# Altium PCB PCB.PcbDoc (part 2 of 3)
Units mil, origin at the board's own origin, x right, y up, seen from the top; angles counter-clockwise.
Board outline 8690 x 2710 mil, 2 copper layers (Top Layer, Bottom Layer); 78 components, 139 nets, 435 pads, 186 vias.
Unrouted connection lines stored in the file: 1.
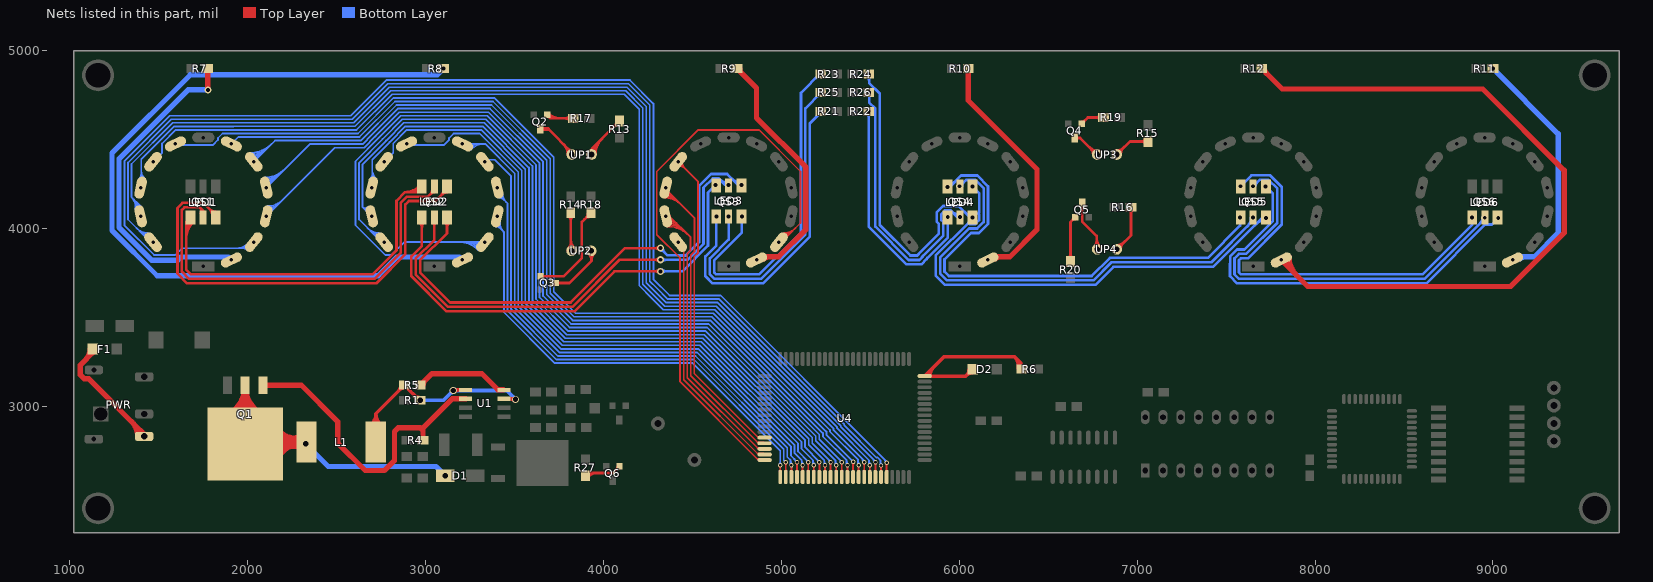
[diagram p2: the nets of this part, all layers, seen from the top]

## Via types
v1: diameter 24, hole 15, Top Layer to Bottom Layer, 111 vias
v2: diameter 40, hole 22, Top Layer to Bottom Layer, 33 vias
v3: diameter 40, hole 30, Top Layer to Bottom Layer, 28 vias
v4: diameter 30, hole 20, Top Layer to Bottom Layer, 10 vias
v5: diameter 35, hole 20, Top Layer to Bottom Layer, 3 vias
v6: diameter 40, hole 20, Top Layer to Bottom Layer, 1 vias

## Nets (pads, with @x,y where several pads share a name; then routed paths per layer and width w, separated by ;. In a path a pad name is that pad's centre, name@x,y a point inside that pad or via, vN(x,y) a via of type N, cw(c..) or ccw(c..) an arc to the next point about the centre after c; other vN are vias at no path point) (continued)
NetD1_3: D1.3 L1.1 Q1.2 | length 4554.5
  Top Layer w30: Q1.2@1889.61,2954.32 ccw(c1793.44,3119.99) Q1.2@1985,3120 ; Q1.2@1904.67,2928.38 ccw(c1823.69,3067.88) 1985,3067.88 ccw(c2146.31,3067.88) Q1.2@2065.33,2928.38 ; Q1.2@1915,2790 Q1.2@1935,2810 ; Q1.2@1919.73,2902.43 ccw(c1853.94,3015.78) 1985,3015.78 ccw(c2116.06,3015.78) Q1.2@2050.27,2902.43 ; Q1.2@2080.39,2954.32 cw(c2176.56,3119.99) Q1.2@1985,3120 ; Q1.2@2100.46,2862.42 ccw(c2217.49,2940.92) 2217.49,2800 ; Q1.2@2106.53,2727.58 cw(c2228.74,2660.68) 2228.74,2800 ; Q1.2@2125.38,2879.13 ccw(c2273.74,2978.65) L1.1@2273.74,2800 ; Q1.2@2132.85,2713.17 cw(c2279.37,2632.97) L1.1@2279.37,2800 ; Q1.2@2150.29,2895.84 ccw(c2329.99,3016.38) L1.1@2330,2800 ; Q1.2@2159.16,2698.77 cw(c2329.99,2605.25) L1.1@2330,2800 ; 2210.4,2816.65 ccw(c2239.27,2926.51) L1.1@2305.47,2834.2 ; 2217.78,2783.5 cw(c2243.79,2686.41) L1.1@2304.56,2766.48 ; 2232.62,2773.91 ccw(c2206.82,2870.21) L1.1@2293.44,2820.84 ; 2232.63,2773.91 cw(c2258.43,2677.63) L1.1@2308.75,2763.67 ; 2259.02,2794.55 ccw(c2244.31,2849.47) L1.1@2293.55,2821.04 ; 2261.49,2803.22 cw(c2248.07,2752.18) L1.1@2293.65,2778.78 ; 2272.1,2800.43 ccw(c2287.54,2859.2) L1.1@2322.96,2809.82 ; L1.1@2288.79,2800 cw(c2288.79,2753.79) L1.1@2321.46,2786.46 ; L1.1@2290.64,2810.54 cw(c2277.84,2762.77) L1.1@2320.67,2787.5 ; L1.1@2291.66,2789.73 cw(c2302.18,2750.47) L1.1@2322.5,2785.67 ; L1.1@2293.55,2778.96 ccw(c2205.57,2728.16) 2231.86,2826.29 ccw(c2258.15,2924.45) L1.1@2308.96,2836.45 ; L1.1@2300.24,2770.24 ccw(c2228.39,2698.39) 2228.39,2800 ccw(c2228.39,2901.61) L1.1@2300.24,2829.76 ; Q1.2@1985,3120 Q1.2@1985,2790 1995,2800 L1.1@2330,2800
  Bottom Layer w30: v3(2325,2790) 2452,2663 3057,2663 v3(3110,2610)
NetD2_2: D2.2 R6.1 U4.40 | length 1268.6
  Top Layer w20: U4.40@5815.16,3171.22 cw(c5840.15,3171.22) 5822.48,3188.9 ; U4.40@5835.16,3171.22 cw(c5908.44,3171.22) 5856.62,3223.04 ; D2.2@6055,3210 cw(c6006.72,3210) 6040.86,3175.86 cw(c6075,3141.72) D2.2@6075,3190 ; D2.2@6075,3210 6036.22,3171.22 U4.40@5804.8,3171.22 5913.58,3280 6310,3280 ; R6.1@6330.29,3212.95 ccw(c6257.53,3227.52) 6310,3280 ; R6.1@6334.66,3220.86 ccw(c6311.67,3245) 6345,3245 ; 6336.42,3253.58 cw(c6301.54,3218.71) R6.1@6349.9,3209.02 ; R6.1@6355,3215 6345,3205 6345,3245 ; R6.1@6355.34,3220.86 cw(c6378.33,3245) 6345,3245 ; 6310,3280 6345,3245
NetF1_1: F1.1 PWR.1 | length 875.7
  Top Layer w30: 1088.02,3262.69 ccw(c1027.71,3323) F1.1@1113,3323 ; F1.1@1128,3323 1128,3302.67 1058.08,3232.75 1058.08,3177.97 1079.78,3156.27 1104.73,3156.27 1417.09,2843.91 PWR.1@1417.09,2832.02 ; 1346.92,2914.08 cw(c1264.86,2832.02) PWR.1@1380.91,2832.02 ; 1398.14,2862.86 cw(c1367.29,2832.02) PWR.1@1410.91,2832.02
NetL1_2: L1.2 R1.1 R5.1 U1.1 U1.7 | length 1895
  Top Layer w20: L1.2@2689.57,2895.19 ccw(c2635.62,2959.76) 2719.76,2959.76 ; L1.2@2702.4,2879.84 ccw(c2671.36,2916.99) 2719.76,2916.99 ccw(c2768.17,2916.99) L1.2@2737.13,2879.84 ; L1.2@2719.76,2800 2719.76,2959.76 ; L1.2@2749.96,2895.19 cw(c2803.91,2959.76) 2719.76,2959.76 ; 2845.86,3085.86 ccw(c2811.72,3120) R5.1@2860,3120 ; R5.1@2857.93,3097.93 cw(c2875,3080.86) R5.1@2875,3105 ; R5.1@2885,3105 cw(c2885,3080.86) R5.1@2902.07,3097.93 ; R5.1@2900,3120 ccw(c2948.28,3120) 2914.14,3085.86 ; R1.1@2944.39,3055.61 ccw(c2970,3081.21) R1.1@2970,3045 ; R1.1@2946.62,3047.62 ccw(c2978.02,3056.03) R1.1@2966.44,3025.66 ; R1.1@2950,3035 ccw(c2913.79,3035) 2939.39,3060.61 ccw(c2965,3086.21) R1.1@2965,3050 ; v3(2970,3035) 2965,3035 R5.1@2880,3120 2719.76,2959.76 ; v3(3155,3090) 3158,3093 U1.1@3224.5,3093 ; v3@3162.07,3082.93 cw(c3186.38,3058.62) 3186.38,3093 ; U1.7@3439.5,3043 3502,3043 v3(3505,3040) ; U1.7@3473.62,3043 cw(c3473.62,3008.62) v3@3497.93,3032.93
  Bottom Layer w20: v3(2970,3035) 3100,3035 v3(3155,3090) 3455,3090 v3(3505,3040) ; v3@2977.07,3027.93 cw(c2994.14,3010.86) 2994.14,3035 cw(c2994.14,3059.14) v3@2977.07,3042.07 ; v3@3145,3090 cw(c3120.86,3090) 3137.93,3072.93 cw(c3155,3055.86) v3@3155,3080 ; v3@3162.07,3082.93 cw(c3179.14,3065.86) 3179.14,3090 cw(c3179.14,3114.14) v3@3162.07,3097.07 ; v3@3495,3040 ccw(c3470.86,3040) 3487.93,3057.07 ccw(c3505,3074.14) v3@3505,3050
NetLED1_3: LED1.3 LED2.0 | length 2417.9
  Top Layer w15: 1654,3944.59 cw(c1784.37,3944.59) LED1.3@1692.18,4036.78 ; 1654,3980.81 cw(c1748.15,3980.81) LED1.3@1681.58,4047.38 ; 1654,4017.02 cw(c1711.94,4017.02) LED1.3@1670.97,4057.99 ; LED1.3@1678,4062.77 1654,4038.77 1654,3768.5 1679.76,3742.74 2701.06,3742.74 2835.26,3876.94 2835.26,4155.97 2884.42,4205.13 ; 2919.41,4205.13 ccw(c2919.41,4280.96) LED2.0@2974.34,4228.68 ; LED2.0@2952.11,4211.11 ccw(c2938.03,4225.19) LED2.0@2957.94,4225.19 ; LED2.0@2963.47,4239.02 cw(c2884.42,4314.26) 2884.42,4205.13 ; LED2.0@2967.83,4207.9 ccw(c2958.77,4192.49) 2946.13,4205.13 ; LED2.0@2978,4237 2946.13,4205.13 ; 2884.42,4205.13 2946.13,4205.13
NetLED1_4: LED1.4 LED2.1 | length 2726.4
  Top Layer w15: 1785.31,4109.27 cw(c1750.62,4074.58) LED1.4@1799.67,4074.58 ; 1785.93,4108.64 ccw(c1819.73,4142.44) LED1.4@1819.73,4094.64 ; LED1.4@1819.73,4062.77 1819.73,4074.84 1749.93,4144.64 1632.84,4144.64 1604,4115.8 1604,3747.78 1659.05,3692.74 2721.77,3692.74 2885.26,3856.23 2885.26,4135.26 2905.13,4155.13 3055.13,4155.13 3119.73,4219.73 LED2.1@3119.73,4237 ; 3081.63,4181.63 ccw(c3038.07,4225.19) LED2.1@3099.67,4225.19 ; 3094.8,4194.8 cw(c3119.73,4169.88) LED2.1@3119.73,4205.13
NetLED1_5: LED1.5 LED2.2 | length 2450.9
  Top Layer w15: LED1.5@1736.69,4086.99 ccw(c1708.61,4098.25) 1730,4119.64 ; 1746.07,4103.57 cw(c1731.55,4089.05) LED1.5@1750.61,4081.41 ; LED1.5@1748,4062.77 1748,4101.64 1730,4119.64 ; 3025.79,4193.11 ccw(c3001.59,4217.31) LED2.2@3035.82,4217.31 ; LED2.2@3030.6,4197.92 cw(c3048,4180.52) LED2.2@3048,4205.13 ; LED2.2@3048,4237 3048,4215.32 3012.81,4180.13 2894.77,4180.13 2860.26,4145.62 2860.26,3866.58 2711.42,3717.74 1669.4,3717.74 1629,3758.14 1629,4105.45 1643.19,4119.64 1730,4119.64
NetLED2_3: LED2.3 LED3.0 | length 2835.7
  Top Layer w15: LED2.3@2963.82,4037.78 cw(c2929.57,4003.53) 2978,4003.53 cw(c3026.43,4003.53) LED2.3@2992.18,4037.78 ; LED2.3@2978,4063.77 2978,3902.59 2918.72,3843.31 2918.72,3732.28 3116,3535 3835.71,3535 4060.71,3760 v2(4320,3760) ; v2@4311.16,3751.16 ccw(c4289.82,3729.82) 4289.82,3760 ccw(c4289.82,3790.18) v2@4311.16,3768.84
  Bottom Layer w15: v2(4320,3760) 4442.58,3760 4587,3904.42 4587,4202 v2(4630,4245) ; v2@4328.84,3751.16 cw(c4350.18,3729.82) 4350.18,3760 cw(c4350.18,3790.18) v2@4328.84,3768.84 ; v2@4617.5,4245 cw(c4587.32,4245) 4608.66,4223.66 cw(c4630,4202.32) v2@4630,4232.5
NetLED2_4: LED2.4 LED3.1 | length 3050.7
  Top Layer w15: LED2.4@3105.55,4037.78 cw(c3071.31,4003.53) 3119.73,4003.53 cw(c3168.16,4003.53) LED2.4@3133.92,4037.78 ; LED2.4@3119.73,4063.77 3119.73,3973.61 2968.72,3822.6 2968.72,3752.99 3136.71,3585 3815,3585 4120,3890 v2(4320,3890) ; v2@4311.16,3881.16 ccw(c4289.82,3859.82) 4289.82,3890 ccw(c4289.82,3920.18) v2@4311.16,3898.84
  Bottom Layer w15: v2@4320,3877.5 cw(c4320,3847.32) 4341.34,3868.66 cw(c4362.68,3890) v2@4332.5,3890 ; v2(4320,3890) 4360,3850 4423.79,3850 4424.46,3849.32 4461.19,3849.32 4537,3925.13 4537,4240.39 4604.11,4307.5 4694.53,4307.5 4757.03,4245 v2(4775,4245) ; 4722.99,4279.04 ccw(c4775,4331.05) v2@4775,4257.5 ; 4748.6,4253.44 ccw(c4775,4279.84) v2@4775,4242.5
NetLED2_5: LED2.5 LED3.2 | length 2962.7
  Top Layer w15: LED2.5@3039.38,4035.47 cw(c3018.58,4014.67) 3048,4014.67 cw(c3077.42,4014.67) LED2.5@3056.62,4035.47 ; LED2.5@3048,4063.77 3048,3937.24 2943.72,3832.96 2943.72,3742.63 3126.35,3560 3825.36,3560 4090.36,3825 v2(4320,3825) ; v2@4311.16,3816.16 ccw(c4289.82,3794.82) 4289.82,3825 ccw(c4289.82,3855.18) v2@4311.16,3833.84
  Bottom Layer w15: v2(4320,3825) 4320.68,3824.32 4471.55,3824.32 4562,3914.78 4562,4230.03 4614.47,4282.5 4645.53,4282.5 4682.03,4246 ; v2@4328.84,3816.16 cw(c4348.55,3796.45) 4348.55,3824.32 ; v2@4328.84,3833.84 ccw(c4351.81,3856.81) 4351.81,3824.32 ; 4645.87,4282.16 ccw(c4703,4339.3) v2@4703,4258.5 ; 4671.47,4256.56 ccw(c4703,4288.08) v2@4703,4243.5 ; v2@4692,4240.06 ccw(c4682.03,4234.67) 4682.03,4246 ; v2@4692,4251.94 cw(c4682.03,4257.33) 4682.03,4246 ; v2(4703,4246) 4682.03,4246
NetLED3_3: LED3.3 R21.1 | length 1889.7
  Bottom Layer w15: v2@4625.16,4059.16 cw(c4603.82,4037.82) 4634,4037.82 cw(c4664.18,4037.82) v2@4642.84,4059.16 ; v2(4634,4068) 4634,3905.05 4572.26,3843.31 4572.26,3732.28 4611.8,3692.74 4895.17,3692.74 5159.35,3956.91 5159.35,4592.35 5218,4651 v2(5218,4660) ; 5190.3,4623.3 ccw(c5153.59,4660) v2@5205.5,4660
NetLED3_4: LED3.4 R23.1 | length 2010
  Bottom Layer w15: v2@4768.16,4060.16 cw(c4746.82,4038.82) 4777,4038.82 cw(c4807.18,4038.82) v2@4785.84,4060.16 ; v2(4777,4069) 4777,3977.34 4622.26,3822.6 4622.26,3752.99 4632.52,3742.74 4874.46,3742.74 5109.35,3977.63 5109.35,4763.35 v2@5223,4877 ; 5191.83,4845.83 cw(c5220,4817.67) v2@5220,4857.5 ; 5201.49,4855.49 ccw(c5186.98,4870) v2@5207.5,4870
  other v2: 5220,4870
NetLED3_5: LED3.5 R25.1 | length 1950.2
  Bottom Layer w15: v2@4694.16,4060.16 cw(c4672.82,4038.82) 4703,4038.82 cw(c4733.18,4038.82) v2@4711.84,4060.16 ; v2(4703,4069) 4703,3938.69 4597.26,3832.96 4597.26,3742.63 4622.16,3717.74 4884.82,3717.74 5134.35,3967.27 5134.35,4676.35 v2(5223,4765) ; v2@5210.5,4765 cw(c5180.32,4765) 5201.66,4743.66 cw(c5223,4722.32) v2@5223,4752.5
NetLED4_0: LED4.0 LED5.3 | length 2816.9
  Bottom Layer w15: v2(5933,4235) 5945.97,4235 6009.47,4298.5 6100.89,4298.5 6161.5,4237.89 6161.5,4026.76 6110.24,3975.5 6065.5,3975.5 5917,3827 5917,3758.25 5941.25,3734 6744.29,3734 6846.21,3835.93 7397.79,3835.93 7579,4017.13 v2(7579,4062) ; v2@5933,4247.5 ccw(c5933,4308.98) 5976.47,4265.51 ; v2@7570.16,4053.16 cw(c7548.82,4031.82) 7579,4031.82 cw(c7609.18,4031.82) v2@7587.84,4053.16
NetLED4_1: LED4.1 LED5.4 | length 2875.4
  Bottom Layer w15: v2@6075,4223.5 cw(c6075,4193.32) 6096.34,4214.66 cw(c6117.68,4236) v2@6087.5,4236 ; v2(6075,4236) 6111.5,4199.5 6111.5,4089.86 6105.84,4084.19 6111.5,4078.53 6111.5,4047.47 6089.53,4025.5 6058.47,4025.5 6052.81,4031.16 6050.45,4031.16 5867,3847.71 5867,3737.54 5920.54,3684 6765,3684 6866,3785 7376,3785 7376.93,3785.93 7427.96,3785.93 7701.03,4059 ; 7662.75,4020.71 cw(c7725,3958.46) v2@7725,4046.5 ; 7688.35,4046.32 cw(c7725,4009.67) v2@7725,4061.5 ; v2@7714.75,4051.85 ccw(c7701.03,4042.28) 7701.03,4059 ; v2@7714.75,4066.15 cw(c7701.03,4075.72) 7701.03,4059 ; v2(7725,4059) 7701.03,4059
NetLED4_2: LED4.2 LED5.5 | length 2841.9
  Bottom Layer w15: v2(6002,4238) 6037.5,4273.5 6090.53,4273.5 6136.5,4227.53 6136.5,4037.11 6099.89,4000.5 6055.14,4000.5 5892,3837.36 5892,3747.9 5930.9,3709 6754.64,3709 6856.57,3810.93 7417.6,3810.93 7652,4045.32 v2(7652,4063) ; v2@6002,4250.5 ccw(c6002,4280.68) 6023.34,4259.34 ccw(c6044.68,4238) v2@6014.5,4238 ; 7618.16,4011.48 ccw(c7566.64,4063) v2@7639.5,4063 ; 7643.77,4037.09 ccw(c7617.86,4063) v2@7654.5,4063
NetLED4_3: LED4.3 R22.2 | length 1405.7
  Bottom Layer w15: v2@5481.16,4650.16 cw(c5459.82,4628.82) 5490,4628.82 cw(c5520.18,4628.82) v2@5498.84,4650.16 ; v2(5490,4659) 5490,4013.07 5704.07,3799 5786,3799 5815,3828 5815,3828.71 5820,3833.71 5820,3836.07 5935,3951.07 v2(5935,4065)
NetLED4_4: LED4.4 R24.2 | length 1822.2
  Bottom Layer w15: v2@5481.16,4860.16 cw(c5452.58,4831.58) 5493,4831.58 ; 5493,4846.06 cw(c5512.94,4846.06) v2@5498.84,4860.16 ; v2@5493,4876 5493,4819.03 5552.5,4759.53 5552.5,4021.29 5724.46,3849.32 5764.9,3849.32 5770,3854.42 5770,3856.78 5885,3971.78 5885,4026.61 5872.5,4039.11 5872.5,4090.89 5909.11,4127.5 5995.53,4127.5 6060.03,4063 v2(6074,4063) ; 6028.82,4094.21 ccw(c6074,4139.4) v2@6074,4075.5 ; 6054.42,4068.61 ccw(c6074,4088.18) v2@6074,4060.5
  other v2: 5490,4869
NetLED4_5: LED4.5 R26.2 | length 1673.7
  Bottom Layer w15: v2@5484.16,4757.16 cw(c5462.82,4735.82) 5493,4735.82 cw(c5523.18,4735.82) v2@5501.84,4757.16 ; v2(5493,4766) 5493,4709.03 5527.5,4674.53 5527.5,4010.93 5714.43,3824 5775.64,3824 5790,3838.36 5790,3839.07 5795,3844.07 5795,3846.42 5910,3961.42 5910,4036.97 5897.5,4049.47 5897.5,4080.53 5919.47,4102.5 5950.53,4102.5 5987.03,4066 v2(6004,4066) ; 5953.7,4099.34 ccw(c6004,4149.64) v2@6004,4078.5 ; 5979.3,4073.73 ccw(c6004,4098.43) v2@6004,4063.5
NetLED5_0: LED5.0 LED6.3 | length 2455.6
  Bottom Layer w15: v2(7580,4238) 7641.5,4299.5 7747.89,4299.5 7812.5,4234.89 7812.5,4022.76 7622.6,3832.85 7582.52,3832.85 7572.26,3822.6 7572.26,3752.99 7582.52,3742.74 8604.6,3742.74 8883,4021.13 v2(8883,4062) ; v2@7580,4250.5 ccw(c7580,4280.68) 7601.34,4259.34 ccw(c7622.68,4238) v2@7592.5,4238 ; v2@8874.16,4053.16 cw(c8852.82,4031.82) 8883,4031.82 cw(c8913.18,4031.82) v2@8891.84,4053.16
NetLED5_1: LED5.1 LED6.4 | length 2415.8
  Bottom Layer w15: v2@7722,4224.5 cw(c7722,4194.32) 7743.34,4215.66 cw(c7764.68,4237) v2@7734.5,4237 ; v2(7722,4237) 7762.5,4196.5 7762.5,4043.47 7601.89,3882.85 7561.8,3882.85 7522.26,3843.31 7522.26,3803.23 7522,3802.97 7522,3732.54 7561.8,3692.74 8625.31,3692.74 8956.08,4023.5 8993.5,4023.5 v2(9030,4060) ; v2@9017.5,4060 cw(c8987.32,4060) 9008.66,4038.66 cw(c9030,4017.32) v2@9030,4047.5
NetLED5_2: LED5.2 LED6.5 | length 2432.9
  Bottom Layer w15: v2(7652,4238) 7688.5,4274.5 7737.53,4274.5 7787.5,4224.53 7787.5,4033.11 7612.24,3857.85 7572.16,3857.85 7547.26,3832.96 7547.26,3792.88 7547,3792.61 7547,3742.9 7572.16,3717.74 8614.96,3717.74 8954,4056.78 v2(8954,4061) ; v2@7652,4250.5 ccw(c7652,4280.68) 7673.34,4259.34 ccw(c7694.68,4238) v2@7664.5,4238 ; 8929.68,4032.45 ccw(c8901.13,4061) v2@8941.5,4061 ; 8939.87,4042.65 cw(c8954,4028.52) v2@8954,4048.5
NetQ1_1: Q1.1 R4.2 U1.2 | length 1802.4
  Top Layer w30: Q1.1@2085,3120 2300,3120 2505,2915 2505,2795 2660,2640 2768.35,2640 2824,2695.65 2824,2859 2845,2880 2970,2880 2985,2865 R4.2@2985,2810 2985,2880 3148,3043 U1.2@3224.5,3043
NetQ2_1: Q2.1 R17.2 | length 380.6
  Top Layer w15: Q2.1@3679.32,4636.82 ccw(c3719.92,4677.42) 3719.92,4620 ; Q2.1@3682.5,4629.5 cw(c3682.5,4604.15) 3700.42,4622.08 cw(c3718.35,4640) Q2.1@3693,4640 ; Q2.1@3682.5,4640 3702.5,4620 R17.2@3830,4620 ; Q2.1@3689.92,4647.42 ccw(c3756.13,4713.63) 3756.13,4620 ; R17.2@3812.63,4607.63 ccw(c3782.75,4577.75) 3782.75,4620 ccw(c3782.75,4662.25) R17.2@3812.63,4632.37
NetQ2_3: Q2.3 UP1.2 | length 397.4
  Top Layer w15: 3689,4560 3817.1,4431.9 UP1.2@3801.77,4416.57 ; 3775.83,4473.17 cw(c3719.23,4416.57) UP1.2@3799.27,4416.57 ; 3801.44,4447.56 cw(c3770.45,4416.57) UP1.2@3814.27,4416.57 ; 3801.55,4447.45 ccw(c3821.77,4467.67) UP1.2@3821.77,4439.07
  Top Layer w20: Q2.3@3644.5,4560 3689,4560 ; Q2.3@3650.16,4554.34 cw(c3663.81,4540.69) 3663.81,4560 cw(c3663.81,4579.31) Q2.3@3650.16,4565.66
NetQ3_1: Q3.1 R18.2 | length 658.8
  Top Layer w15: Q3.1@3645,3732.5 3776.5,3732.5 3878,3834 3878,4038 R18.2@3930,4090 ; Q3.1@3652.42,3725.08 cw(c3670.35,3707.15) 3670.35,3732.5 cw(c3670.35,3757.85) Q3.1@3652.42,3739.92 ; 3891.59,4051.59 cw(c3930,4013.18) R18.2@3930,4067.5 ; 3903.66,4063.66 ccw(c3882.32,4085) R18.2@3912.5,4085
NetQ3_3: Q3.3 UP2.2 | length 445.3
  Top Layer w15: Q3.3@3725,3694.5 3808.5,3694.5 3932,3818 3932,3857 UP2.2@3950,3875 ; Q3.3@3739.42,3687.08 cw(c3757.35,3669.15) 3757.35,3694.5 cw(c3757.35,3719.85) Q3.3@3739.42,3701.92 ; UP2.2@3914.51,3858.68 cw(c3875.87,3817.97) 3932,3817.97 ; 3932,3825.51 cw(c3979.49,3825.51) UP2.2@3945.91,3859.09
NetQ4_1: Q4.1 R19.2 | length 243.2
  Top Layer w15: Q4.1@6687.5,4590 6722.5,4625 R19.2@6810,4625 ; Q4.1@6687.5,4600.5 ccw(c6687.5,4625.85) 6705.42,4607.92 ccw(c6723.35,4590) Q4.1@6698,4590 ; R19.2@6792.63,4612.63 ccw(c6762.75,4582.75) 6762.75,4625 ccw(c6762.75,4667.25) R19.2@6792.63,4637.37
NetQ4_3: Q4.3 UP3.2 | length 278.8
  Top Layer w15: Q4.3@6649.5,4510 6678,4510 6754.53,4433.47 UP3.2@6754.53,4416.57 ; Q4.3@6656.92,4502.58 cw(c6674.85,4484.65) 6674.85,4510 cw(c6674.85,4535.35) Q4.3@6656.92,4517.42 ; 6730.82,4457.18 ccw(c6774.53,4500.88) UP3.2@6774.53,4439.07 ; 6738.31,4449.69 cw(c6705.2,4416.57) UP3.2@6752.03,4416.57
NetQ5_1: Q5.1 R20.2 | length 367.6
  Top Layer w15: R20.2@6612.63,3832.37 ccw(c6582.75,3862.25) 6625,3862.25 ccw(c6667.25,3862.25) R20.2@6637.37,3832.37 ; R20.2@6625,3815 6625,4037.5 Q5.1@6652.5,4065 ; Q5.1@6642,4065 cw(c6616.65,4065) 6634.58,4047.08 cw(c6652.5,4029.15) Q5.1@6652.5,4054.5
NetQ5_3: Q5.3 UP4.2 | length 427.7
  Top Layer w15: Q5.3@6683.08,4130.58 cw(c6665.15,4112.65) 6690.5,4112.65 cw(c6715.85,4112.65) Q5.3@6697.92,4130.58 ; Q5.3@6690.5,4145 6690.5,4041.25 6772,3959.75 6772,3900.9 UP4.2@6754.53,3883.43 ; UP4.2@6758.62,3899.34 ccw(c6726.31,3931.64) 6772,3931.64 ; 6772,3943.85 ccw(c6834.95,3943.85) UP4.2@6790.44,3899.34
NetQ6_1: Q6.1 R27.2 | length 347.5
  Top Layer w15: R27.2@3898,2611 3913.5,2626.5 4052,2626.5 Q6.1@4089.5,2664 ; R27.2@3899.77,2614.23 cw(c3929.38,2584.62) 3929.38,2626.5 ; R27.2@3910.37,2603.63 cw(c3965.6,2548.4) 3965.6,2626.5 ; Q6.1@4079,2664 cw(c4053.65,2664) 4071.58,2646.08 cw(c4089.5,2628.15) Q6.1@4089.5,2653.5
NetQS1_2: QS1.2 R7.1 | length 1887.8
  Top Layer w30: v2(1775,4780) R7.1@1775,4900
  Bottom Layer w30: v2(1775,4780) 1663.84,4780 1275.9,4392.07 1275.9,4006.23 1460.31,3821.82 1604.25,3821.82 1622.78,3840.35 1890.47,3840.35 QS1.2@1907.15,3823.66
NetQS2_2: QS2.2 R8.1 | length 4622.2
  Bottom Layer w30: v2(3100,4900) 3065,4865 1676.36,4865 1235.9,4424.54 1235.9,3989.67 1490.33,3735.24 2732.45,3735.24 2837.57,3840.35 3189.68,3840.35 QS2.2@3206.37,3823.66
NetQS3_2: QS3.2 R9.1 | length 1473.2
  Top Layer w30: R9.1@4750,4900 4859.91,4790.09 4859.91,4622.52 5136.85,4345.57 5136.85,3994.52 4984.16,3841.82 4878.07,3841.82 QS3.2@4859.91,3823.66 ; R9.1@4765,4900 ccw(c4801.21,4900) 4775.61,4874.39 ; QS3.2@4900.72,3830.16 cw(c4928.88,3801.99) 4928.88,3841.82
NetQS4_2: QS4.2 R10.1 | length 1442.5
  Top Layer w30: R10.1@6050,4900 6050,4720.62 6436.85,4333.77 6436.85,3994.52 6283.34,3841.01 6177.25,3841.01 QS4.2@6159.91,3823.66 ; QS4.2@6200.72,3830.16 cw(c6226.91,3803.97) 6226.91,3841.01
NetQS5_2: QS5.2 R12.1 | length 4263.5
  Top Layer w30: R12.1@7700,4900 7815.24,4784.76 8942.66,4784.76 9400,4327.43 9400,3975.91 9099.09,3675 7958.58,3675 QS5.2@7809.91,3823.66 ; R12.1@7715,4900 ccw(c7751.21,4900) 7725.61,4874.39 ; QS5.2@7824.39,3839.04 ccw(c7896.47,3839.04) 7845.51,3788.07 ; QS5.2@7854.39,3839.04 ccw(c7998.9,3839.04) 7896.72,3736.86
NetQS6_2: QS6.2 R11.1 | length 1428.1
  Bottom Layer w30: v2(9000,4900) 9366.85,4533.15 9366.85,3974.52 9234.16,3841.82 9128.07,3841.82 QS6.2@9109.91,3823.66 ; QS6.2@9150.72,3830.16 cw(c9178.88,3801.99) 9178.88,3841.82
NetR5_2: R5.2 U1.8 | length 557.6
  Top Layer w30: R5.2@2970,3120 3035,3185 3315,3185 3405,3095 U1.8@3435,3095 ; R5.2@2985,3120 cw(c3021.21,3120) 2995.61,3145.61
NetR13_2: R13.2 UP1.1 | length 575.4
  Top Layer w15: UP1.1@3924.27,4416.57 cw(c3979.07,4416.57) 3940.32,4455.32 ; UP1.1@3926.2,4438.37 ccw(c3922.97,4451) 3936,4451 ; UP1.1@3939.27,4416.57 cw(c4030.28,4416.57) 3965.93,4480.93 ; UP1.1@3944.38,4435.21 cw(c3955.06,4451) 3936,4451 ; UP1.1@3951.77,4416.57 3936,4432.35 3936,4451 ; UP1.1@3954.27,4416.57 cw(c4081.49,4416.57) 3991.53,4506.53 ; 4051.59,4566.59 cw(c4090,4528.18) R13.2@4090,4582.5 ; 4063.66,4578.66 ccw(c4042.32,4600) R13.2@4072.5,4600 ; R13.2@4090,4605 3936,4451
NetR14_2: R14.2 UP2.1 | length 400.5
  Top Layer w15: UP2.1@3800,3875 3815,3890 R14.2@3815,4090 ; R14.2@3802.63,4072.63 cw(c3772.75,4042.75) 3815,4042.75 cw(c3857.25,4042.75) R14.2@3827.37,4072.63 ; UP2.1@3804.09,3890.91 ccw(c3777.75,3917.25) 3815,3917.25 ; 3815,3905.18 ccw(c3850.18,3905.18) UP2.1@3825.3,3880.3 ; 3815,3941.39 ccw(c3886.39,3941.39) UP2.1@3835.91,3890.91
NetR15_2: R15.2 UP3.1 | length 348.7
  Top Layer w15: UP3.1@6884.53,4439.07 ccw(c6884.53,4495.92) 6924.73,4455.73 ; UP3.1@6904.53,4416.57 6904.53,4435.53 6959,4490 R15.2@7060,4490 ; UP3.1@6907.03,4416.57 cw(c6958.82,4416.57) 6922.2,4453.2 ; R15.2@7047.63,4477.63 ccw(c7017.75,4447.75) 7017.75,4490 ccw(c7017.75,4532.25) R15.2@7047.63,4502.37
NetR16_2: R16.2 UP4.1 | length 413.3
  Top Layer w15: UP4.1@6884.53,3905.93 ccw(c6884.53,3964.83) 6926.18,3923.18 ; UP4.1@6904.53,3883.43 6904.53,3901.53 6965,3962 R16.2@6965,4120 ; UP4.1@6907.03,3883.43 cw(c6956.77,3883.43) 6921.6,3918.6 ; R16.2@6952.63,4107.63 cw(c6922.75,4077.75) 6965,4077.75 cw(c7007.25,4077.75) R16.2@6977.37,4107.63
QS1-0: QS1.3 U4.20 | length 7414.6
  Top Layer w10: v1@5587.05,2679.05 cw(c5576.98,2668.98) 5591.22,2668.98 ; U4.20@5587.1,2636.95 ccw(c5577.15,2646.9) 5591.22,2646.9 ccw(c5605.29,2646.9) U4.20@5595.34,2636.95 ; U4.20@5591.22,2603.31 v1@5591.22,2684 ; 5591.22,2665.22 cw(c5610.78,2665.22) v1@5596.95,2679.05
  Bottom Layer w10: 1941.02,3890 ccw(c1941.02,3966.54) QS1.3@1995.14,3912.42 ; 1965.16,3890 ccw(c1965.16,3942.4) QS1.3@2002.21,3905.35 ; 1972.24,3890 cw(c1972.24,3857.62) QS1.3@1995.14,3880.51 ; QS1.3@2033.18,3924.17 1999.01,3890 1630,3890 1591.82,3851.82 1472.74,3851.82 1305.9,4018.66 1305.9,4379.64 1561.13,4634.86 1895.98,4634.86 1896.11,4635 2577.63,4635 2777.5,4834.86 4148.27,4834.86 4280,4703.14 4280,3715 4371,3624 4657.47,3624 5592,2689.47 v1(5592,2684) ; 5576.18,2705.28 cw(c5554.9,2684) v1@5585,2684
QS1-1: QS1.13 U4.19 | length 6745.2
  Top Layer w10: v1@5554.55,2663.47 cw(c5542.06,2650.98) 5559.72,2650.98 ; U4.19@5555.6,2636.95 ccw(c5545.66,2646.9) 5559.72,2646.9 ccw(c5573.79,2646.9) U4.19@5563.84,2636.95 ; v1(5559.5,2668.42) 5559.5,2669.78 5559.72,2670 U4.19@5559.72,2603.31 ; 5559.72,2652.06 cw(c5575.86,2652.06) v1@5564.45,2663.47
  Bottom Layer w10: 1373.23,4004.04 ccw(c1444.72,4075.53) QS1.13@1444.72,3974.43 ; 1390.3,3986.97 ccw(c1444.72,4041.39) QS1.13@1444.72,3964.43 ; 1407.38,3969.9 ccw(c1444.72,4007.25) QS1.13@1444.72,3954.43 ; QS1.13@1466.82,3924.17 1453.11,3924.17 1325.9,4051.37 1325.9,4371.36 1569.41,4614.86 1904.26,4614.86 1904.4,4615 2585.92,4615 2785.78,4814.86 4139.99,4814.86 4260,4694.85 4260,3704.95 4298.95,3666 4360.98,3603.98 4649.21,3603.98 5352.8,2900.39 5352.8,2893.96 5533.75,2713 5540.18,2713 5556,2697.18 5556,2674.82 5555.45,2674.27 5559.72,2670 v1@5559.72,2676.84 ; 5556,2693.77 ccw(c5584.85,2693.77) v1@5564.45,2673.37
QS1-2: QS1.12 U4.18 | length 6511.2
  Top Layer w10: v1@5524.05,2681.05 cw(c5513.96,2670.96) 5528.23,2670.96 ; U4.18@5524.11,2636.95 ccw(c5514.16,2646.9) 5528.23,2646.9 ccw(c5542.3,2646.9) U4.18@5532.35,2636.95 ; U4.18@5528.23,2603.31 v1@5528.23,2686 ; 5528.23,2667.24 cw(c5547.76,2667.24) v1@5533.95,2681.05
  Bottom Layer w10: 1359.2,4163.5 cw(c1314.2,4118.51) QS1.12@1376.66,4106.35 ; QS1.12@1366.85,4108.26 ccw(c1291.95,4122.84) 1345.91,4176.8 ; 1372.49,4150.21 cw(c1336.46,4114.18) QS1.12@1386.48,4104.44 ; 1385.79,4136.92 cw(c1358.71,4109.84) QS1.12@1396.3,4102.52 ; QS1.12@1396.88,4069.4 1396.88,4125.83 1345.9,4176.8 ; 5514.6,2703.87 cw(c5496.73,2686) v1@5522,2686 ; v1(5529,2686) 5529,2689.47 5332.8,2885.67 5332.8,2892.1 4640.92,3583.98 4352.69,3583.98 4290.67,3646 4240,3696.67 4240,4686.57 4131.7,4794.86 2794.07,4794.86 2594.2,4595 1912.68,4595 1912.55,4594.86 1577.7,4594.86 1345.9,4363.07 1345.9,4176.8
QS1-3: QS1.11 U4.17 | length 6148.5
  Top Layer w10: v1@5491.78,2665.05 cw(c5479.83,2653.1) 5496.73,2653.1 cw(c5513.63,2653.1) v1@5501.68,2665.05 ; U4.17@5492.61,2636.95 ccw(c5482.67,2646.9) 5496.73,2646.9 ccw(c5510.8,2646.9) U4.17@5500.85,2636.95 ; U4.17@5496.73,2603.31 v1(5496.73,2670)
  Bottom Layer w10: QS1.11@1388.81,4281.09 ccw(c1361.59,4308.31) 1400.08,4308.31 ; QS1.11@1396.88,4230.6 1400.08,4233.81 1400.08,4388.97 1585.98,4574.86 1920.83,4574.86 1920.97,4575 2602.49,4575 2802.35,4774.86 4123.42,4774.86 4220,4678.28 4220,3688.38 4282.38,3626 4344.41,3563.98 4632.64,3563.98 5312.8,2883.82 5312.8,2877.39 5492,2698.18 ; 1400.08,4306.76 ccw(c1446.37,4306.76) QS1.11@1413.64,4274.02 ; 1400.08,4330.9 ccw(c1470.52,4330.9) QS1.11@1420.71,4281.09 ; v1(5496.73,2670) 5492,2674.73 5492,2698.18 ; v1@5501.66,2674.97 cw(c5524.71,2698.18) 5492,2698.18
QS1-4: QS1.10 U4.16 | length 5791.2
  Top Layer w10: v1@5460.05,2682.05 cw(c5447.53,2669.53) 5465.24,2669.53 ; U4.16@5461.12,2636.95 ccw(c5451.17,2646.9) 5465.24,2646.9 ccw(c5479.3,2646.9) U4.16@5469.36,2636.95 ; v1(5465,2687) 5465.24,2686.76 U4.16@5465.24,2603.31 ; 5465.24,2670.67 cw(c5481.33,2670.67) v1@5469.95,2682.05
  Bottom Layer w10: QS1.10@1466.82,4375.83 1517.77,4426.78 1517.77,4478.37 1594.26,4554.86 1929.12,4554.86 1929.25,4555 2610.77,4555 2810.63,4754.86 4115.14,4754.86 4200,4670 4200,3680.1 4274.1,3606 4336.12,3543.98 4624.36,3543.98 5292.8,2875.54 5292.8,2866.67 5465,2694.47 v1(5465,2687) ; 5447.77,2711.7 cw(c5423.07,2687) v1@5458,2687
QS1-5: QS1.9 U4.15 | length 5418.7
  Top Layer w10: v1@5428.79,2665.05 cw(c5416.84,2653.1) 5433.74,2653.1 cw(c5450.64,2653.1) v1@5438.69,2665.05 ; U4.15@5429.62,2636.95 ccw(c5419.67,2646.9) 5433.74,2646.9 ccw(c5447.81,2646.9) U4.15@5437.86,2636.95 ; U4.15@5433.74,2603.31 v1(5433.74,2670)
  Bottom Layer w10: QS1.9@1592.85,4476.34 1599.54,4469.65 1803.06,4469.65 1832.07,4498.66 1832.07,4509.58 1857.35,4534.86 1937.4,4534.86 1937.53,4535 2619.05,4535 2818.92,4734.86 3386.26,4734.86 3720,4401.13 3720,3645.98 3842,3523.98 4616.07,3523.98 5272.8,2867.25 5272.8,2858.39 5431,2700.18 5431,2672.74 v1(5433.74,2670) v1@5433.74,2673.86 ; 5431,2693.51 ccw(c5457.26,2693.51) v1@5438.69,2674.95
QS1-6: QS1.7 U4.14 | length 5056.8
  Top Layer w10: U4.14@5398.12,2636.95 ccw(c5388.18,2646.9) 5402.24,2646.9 ccw(c5416.31,2646.9) U4.14@5406.36,2636.95 ; v1@5399.05,2684.05 cw(c5391.34,2676.34) 5402.24,2676.34 ; U4.14@5402.24,2603.31 5402.24,2687.24 v1(5404,2689) ; 5402.24,2667.86 cw(c5425.14,2667.86) v1@5408.95,2684.05
  Bottom Layer w10: QS1.7@1907.15,4476.34 1945.82,4515 2627.34,4515 2827.2,4714.86 3377.98,4714.86 3700,4392.84 3700,3637.69 3833.72,3503.98 4607.79,3503.98 5252.8,2858.97 5252.8,2840.2 v1(5404,2689) v1@5409,2684 ; v1@5397,2689 ccw(c5380.1,2689) 5392.05,2700.95 ccw(c5404,2712.9) v1@5404,2696
QS1-7: QS1.6 U4.13 | length 5483
  Top Layer w10: v1@5365.8,2665.05 cw(c5353.85,2653.1) 5370.75,2653.1 cw(c5387.65,2653.1) v1@5375.7,2665.05 ; U4.13@5366.63,2636.95 ccw(c5356.68,2646.9) 5370.75,2646.9 ccw(c5384.81,2646.9) U4.13@5374.87,2636.95 ; U4.13@5370.75,2603.31 v1(5370.75,2670)
  Bottom Layer w10: QS1.6@2011.09,4366.09 ccw(c2011.09,4395.92) QS1.6@2032.18,4374.83 ; QS1.6@2011.09,4376.09 ccw(c2011.09,4430.06) QS1.6@2049.25,4391.9 ; QS1.6@2011.09,4386.09 ccw(c2011.09,4464.2) 2066.32,4408.97 ; QS1.6@2011.09,4396.09 ccw(c2011.09,4498.34) 2083.39,4426.04 ; QS1.6@2011.09,4406.09 ccw(c2011.09,4532.49) 2100.46,4443.11 ; QS1.6@2011.09,4416.09 ccw(c2011.09,4566.63) 2117.54,4460.18 ; QS1.6@2011.09,4426.09 ccw(c2011.09,4600.77) 2134.61,4477.26 ; QS1.6@2033.18,4375.83 2152.35,4495 2635.62,4495 2835.49,4694.86 3369.69,4694.86 3680,4384.56 3680,3629.41 3825.43,3483.98 4599.5,3483.98 5232.8,2850.68 5232.8,2831.39 5366,2698.18 ; v1@5370.75,2673.86 v1(5370.75,2670) 5366,2674.75 5366,2698.18 ; v1@5375.68,2674.97 cw(c5398.68,2698.18) 5366,2698.18
QS1-8: QS1.5 U4.12 | length 5319.8
  Top Layer w10: v1@5334.05,2682.05 cw(c5321.49,2669.49) 5339.25,2669.49 ; U4.12@5335.13,2636.95 ccw(c5325.19,2646.9) 5339.25,2646.9 ccw(c5353.32,2646.9) U4.12@5343.37,2636.95 ; v1(5339,2687) 5339.25,2686.75 U4.12@5339.25,2603.31 ; 5339.25,2670.71 cw(c5355.29,2670.71) v1@5343.95,2682.05
  Bottom Layer w10: QS1.5@2095.24,4227.7 ccw(c2095.24,4239.74) QS1.5@2103.75,4231.23 ; QS1.5@2095.24,4237.7 ccw(c2095.24,4273.89) QS1.5@2120.83,4248.3 ; QS1.5@2095.24,4247.7 ccw(c2095.24,4308.03) 2137.9,4265.37 ; QS1.5@2095.24,4257.7 ccw(c2095.24,4342.17) 2154.97,4282.44 ; QS1.5@2095.24,4267.7 ccw(c2095.24,4376.31) 2172.04,4299.51 ; QS1.5@2095.24,4277.7 ccw(c2095.24,4410.46) 2189.11,4316.58 ; QS1.5@2095.24,4287.7 ccw(c2095.24,4444.6) 2206.18,4333.66 ; QS1.5@2103.12,4230.6 2347.52,4475 2645,4475 2696.98,4526.98 2696.98,4528.07 2843.77,4674.86 3361.41,4674.86 3660,4376.27 3660,3621.13 3817.15,3463.98 4591.22,3463.98 5212.8,2842.4 5212.8,2816.52 5339,2690.31 v1(5339,2687) ; 5324.71,2704.61 cw(c5307.1,2687) v1@5332,2687
QS1-9: QS1.4 U4.11 | length 5145.1
  Top Layer w10: v1@5302.81,2665.05 cw(c5290.86,2653.1) 5307.76,2653.1 cw(c5324.66,2653.1) v1@5312.71,2665.05 ; U4.11@5303.64,2636.95 ccw(c5293.69,2646.9) 5307.76,2646.9 ccw(c5321.82,2646.9) U4.11@5311.88,2636.95 ; U4.11@5307.76,2603.31 v1(5307.76,2670)
  Bottom Layer w10: QS1.4@2103.12,4069.4 2488.72,4455 2653.28,4455 2716.98,4518.69 2716.98,4519.79 2852.06,4654.86 3353.12,4654.86 3640,4367.99 3640,3612.84 3808.87,3443.98 4582.93,3443.98 5192.8,2834.11 5192.8,2808.24 5303.26,2697.77 ; QS1.4@2111.01,4096.51 ccw(c2111.01,4142.91) 2143.82,4110.1 ; QS1.4@2111.01,4106.51 ccw(c2111.01,4177.05) 2160.89,4127.17 ; QS1.4@2111.01,4116.51 ccw(c2111.01,4211.19) 2177.96,4144.24 ; QS1.4@2111.01,4126.51 ccw(c2111.01,4245.33) 2195.03,4161.31 ; v1@5307.76,2673.86 v1(5307.76,2670) 5303.26,2674.5 5303.26,2697.77 ; v1@5312.71,2674.95 cw(c5335.51,2697.75) 5303.26,2697.75
QS2-0: QS2.3 U4.10 | length 5807.8
  Top Layer w10: v1@5271.31,2681.64 cw(c5259.36,2669.69) 5276.26,2669.69 cw(c5293.16,2669.69) v1@5281.21,2681.64 ; U4.10@5272.14,2636.95 ccw(c5262.19,2646.9) 5276.26,2646.9 ccw(c5290.33,2646.9) U4.10@5280.38,2636.95 ; U4.10@5276.26,2603.31 v1(5276.26,2686.59)
  Bottom Layer w10: 3188.96,3924.17 cw(c3188.96,3775.12) QS2.3@3294.35,3880.51 ; 3213.1,3924.17 cw(c3213.1,3799.27) QS2.3@3301.42,3887.59 ; 3237.25,3924.17 cw(c3237.25,3823.41) QS2.3@3308.49,3894.66 ; 3261.39,3924.17 cw(c3261.39,3847.55) QS2.3@3315.57,3901.73 ; 3285.53,3924.17 cw(c3285.53,3871.69) QS2.3@3322.64,3908.8 ; QS2.3@3309.67,3924.17 cw(c3309.67,3895.83) QS2.3@3329.71,3915.87 ; QS2.3@3332.4,3924.17 2878.96,3924.17 2806.61,3851.82 2771.95,3851.82 2605.12,4018.66 2605.12,4378.55 2736.98,4510.41 2736.98,4511.5 2860.34,4634.86 3344.84,4634.86 3620,4359.71 3620,3604.56 3800.58,3423.98 4574.65,3423.98 5172.8,2825.83 5172.8,2793.67 5276.26,2690.21 v1(5276.26,2686.59) ; QS2.3@3333.81,3924.17 cw(c3333.81,3919.98) QS2.3@3336.78,3922.94 ; 5261.75,2704.72 cw(c5243.62,2686.59) v1@5269.26,2686.59
QS2-1: QS2.13 U4.9 | length 4840.9
  Top Layer w10: v1@5239.81,2665.05 cw(c5227.86,2653.1) 5244.76,2653.1 cw(c5261.66,2653.1) v1@5249.71,2665.05 ; U4.9@5240.64,2636.95 ccw(c5230.7,2646.9) 5244.76,2646.9 ccw(c5258.83,2646.9) U4.9@5248.88,2636.95 ; U4.9@5244.76,2603.31 v1(5244.76,2670)
  Bottom Layer w10: 2672.45,4004.04 ccw(c2743.94,4075.53) QS2.13@2743.94,3974.43 ; 2689.52,3986.97 ccw(c2743.94,4041.39) QS2.13@2743.94,3964.43 ; 2706.59,3969.9 ccw(c2743.94,4007.25) QS2.13@2743.94,3954.43 ; QS2.13@2766.03,3924.17 2752.32,3924.17 2625.12,4051.37 2625.12,4370.26 2756.98,4502.13 2756.98,4503.22 2868.62,4614.86 3336.56,4614.86 3600,4351.42 3600,3596.27 3792.3,3403.98 4566.37,3403.98 5152.8,2817.55 5152.8,2785.39 5240,2698.18 ; v1@5244.76,2673.86 v1(5244.76,2670) 5240,2674.76 5240,2698.18 ; v1@5249.69,2674.98 cw(c5272.64,2698.18) 5240,2698.18
QS2-2: QS2.12 U4.8 | length 4478.6
  Top Layer w10: v1@5208.05,2682.05 cw(c5195.45,2669.45) 5213.27,2669.45 ; U4.8@5209.15,2636.95 ccw(c5199.2,2646.9) 5213.27,2646.9 ccw(c5227.33,2646.9) U4.8@5217.39,2636.95 ; v1(5213,2687) 5213.27,2686.73 U4.8@5213.27,2603.31 ; 5213.27,2670.75 cw(c5229.25,2670.75) v1@5217.95,2682.05
  Bottom Layer w10: 2652.3,4113.19 ccw(c2666,4126.88) QS2.12@2679.47,4112.97 ; 2659.49,4106 ccw(c2673.07,4119.58) QS2.12@2686.42,4105.79 ; QS2.12@2672.51,4120.15 cw(c2658.93,4134.18) 2645.12,4120.37 ; QS2.12@2696.09,4069.4 2645.12,4120.37 ; 5198.6,2704.87 cw(c5180.73,2687) v1@5206,2687 ; v1(5213,2687) 5213,2690.47 5132.8,2770.67 5132.8,2809.26 4558.08,3383.98 3784.01,3383.98 3580,3587.99 3580,4343.14 3328.27,4594.86 2876.91,4594.86 2776.98,4494.94 2776.98,4493.84 2645.12,4361.98 2645.12,4120.37
QS2-3: QS2.11 U4.7 | length 4253.8
  Top Layer w10: v1@5176.82,2665.05 cw(c5164.87,2653.1) 5181.77,2653.1 cw(c5198.67,2653.1) v1@5186.72,2665.05 ; U4.7@5177.65,2636.95 ccw(c5167.7,2646.9) 5181.77,2646.9 ccw(c5195.84,2646.9) U4.7@5185.89,2636.95 ; U4.7@5181.77,2603.31 v1(5181.77,2670)
  Bottom Layer w10: QS2.11@2688.02,4281.09 ccw(c2660.8,4308.31) 2699.3,4308.31 ; QS2.11@2696.09,4230.6 2699.3,4233.81 2699.3,4387.87 2796.98,4485.56 2796.98,4486.65 2885.19,4574.86 3319.99,4574.86 3560,4334.85 3560,3579.71 3775.73,3363.98 4549.8,3363.98 5112.8,2800.98 5112.8,2762.39 5177,2698.18 ; 2699.3,4306.76 ccw(c2745.59,4306.76) QS2.11@2712.85,4274.02 ; 2699.3,4330.9 ccw(c2769.73,4330.9) QS2.11@2719.93,4281.09 ; v1@5181.77,2673.86 v1(5181.77,2670) 5177,2674.77 5177,2698.18 ; v1@5186.69,2674.98 cw(c5209.62,2698.18) 5177,2698.18
QS2-4: QS2.10 U4.6 | length 3886.5
  Top Layer w10: v1@5145.05,2682.05 cw(c5132.44,2669.44) 5150.28,2669.44 ; U4.6@5146.16,2636.95 ccw(c5136.21,2646.9) 5150.28,2646.9 ccw(c5164.34,2646.9) U4.6@5154.4,2636.95 ; v1(5150,2687) 5150.28,2686.72 U4.6@5150.28,2603.31 ; 5150.28,2670.77 cw(c5166.23,2670.77) v1@5154.95,2682.05
  Bottom Layer w10: QS2.10@2766.03,4375.83 2816.98,4426.78 2816.98,4478.37 2893.48,4554.86 3311.7,4554.86 3540,4326.57 3540,3571.42 3767.45,3343.98 4541.51,3343.98 5092.8,2792.69 5092.8,2747.67 5150,2690.47 v1(5150,2687) v1@5151,2686 ; 5135.6,2704.87 cw(c5117.73,2687) v1@5143,2687
QS2-5: QS2.9 U4.5 | length 3662.8
  Top Layer w10: v1@5113.83,2665.05 cw(c5101.88,2653.1) 5118.78,2653.1 cw(c5135.68,2653.1) v1@5123.73,2665.05 ; U4.5@5114.66,2636.95 ccw(c5104.71,2646.9) 5118.78,2646.9 ccw(c5132.85,2646.9) U4.5@5122.9,2636.95 ; U4.5@5118.78,2603.31 v1(5118.78,2670)
  Bottom Layer w10: QS2.9@2892.06,4476.34 2898.75,4469.65 3102.27,4469.65 3131.29,4498.66 3131.29,4509.58 3156.57,4534.86 3303.42,4534.86 3520,4318.28 3520,3563.14 3759.16,3323.98 4533.23,3323.98 5072.8,2784.41 5072.8,2739.39 5114,2698.18 ; v1@5118.78,2673.86 v1(5118.78,2670) 5114,2674.78 5114,2698.18 ; v1@5123.7,2674.98 cw(c5146.6,2698.18) 5114,2698.18
QS2-6: QS2.7 U4.4 | length 3443.5
  Top Layer w10: v1@5082.05,2682.05 cw(c5069.42,2669.42) 5087.28,2669.42 ; U4.4@5083.16,2636.95 ccw(c5073.22,2646.9) 5087.28,2646.9 ccw(c5101.35,2646.9) U4.4@5091.4,2636.95 ; v1(5087,2687) 5087.28,2686.72 U4.4@5087.28,2603.31 ; 5087.28,2670.78 cw(c5103.22,2670.78) v1@5091.95,2682.05
  Bottom Layer w10: QS2.7@3206.37,4476.34 3333.66,4476.34 3500,4310 3500,3554.85 3750.88,3303.98 4524.95,3303.98 5052.8,2776.13 5052.8,2724.55 5087,2690.35 v1(5087,2687) ; QS2.7@3240.1,4459.15 cw(c3281.58,4417.67) 3281.58,4476.34 ; QS2.7@3247.17,4452.08 cw(c3305.73,4393.53) 3305.73,4476.34 ; QS2.7@3254.24,4445.01 cw(c3329.87,4369.38) 3329.87,4476.34 ; 5072.68,2704.66 cw(c5055.02,2687) v1@5080,2687
QS2-7: QS2.6 U4.3 | length 3041.5
  Top Layer w10: v1@5050.84,2665.05 cw(c5038.89,2653.1) 5055.79,2653.1 cw(c5072.69,2653.1) v1@5060.74,2665.05 ; U4.3@5051.67,2636.95 ccw(c5041.72,2646.9) 5055.79,2646.9 ccw(c5069.85,2646.9) U4.3@5059.91,2636.95 ; U4.3@5055.79,2603.31 v1(5055.79,2670)
  Bottom Layer w10: QS2.6@3352.5,4387.5 3387.5,4387.5 3480,4295 3480,3546.57 3742.59,3283.98 4516.66,3283.98 5032.8,2767.84 5032.8,2716.27 5051.29,2697.77 ; v1@5055.79,2673.86 v1(5055.79,2670) 5051.29,2674.5 5051.29,2697.77 ; v1@5060.74,2674.95 cw(c5083.54,2697.75) 5051.29,2697.75
QS2-8: QS2.5 U4.2 | length 2919.9
  Top Layer w10: v1@5019.34,2681.64 cw(c5007.39,2669.69) 5024.29,2669.69 cw(c5041.19,2669.69) v1@5029.24,2681.64 ; U4.2@5020.17,2636.95 ccw(c5010.22,2646.9) 5024.29,2646.9 ccw(c5038.36,2646.9) U4.2@5028.41,2636.95 ; U4.2@5024.29,2603.31 v1(5024.29,2686.59)
  Bottom Layer w10: QS2.5@3402.34,4230.6 3402.34,4199 3460,4141.34 3460,3538.28 3734.31,3263.98 4508.38,3263.98 5012.8,2759.56 5012.8,2698.08 v1(5024.29,2686.59) ; QS2.5@3410.22,4173.49 cw(c3410.22,4130.95) 3440.3,4161.03 ; QS2.5@3422.78,4196.05 ccw(c3465.02,4196.05) 3435.15,4166.19 ; QS2.5@3432.78,4196.05 ccw(c3499.16,4196.05) 3452.22,4149.11
QS2-9: QS2.4 U4.1 | length 2780.5
  Top Layer w10: v1@4987.85,2665.05 cw(c4975.9,2653.1) 4992.8,2653.1 cw(c5009.69,2653.1) v1@4997.75,2665.05 ; U4.1@4988.68,2636.95 ccw(c4978.73,2646.9) 4992.8,2646.9 ccw(c5006.86,2646.9) U4.1@4996.92,2636.95 ; U4.1@4992.8,2603.31 v1(4992.8,2670)
  Bottom Layer w10: QS2.4@3394.45,4012.3 cw(c3394.45,3980.31) 3417.07,4002.93 ; QS2.4@3402.34,4069.4 3402.34,4017.66 3440,3980 3440,3530 3726.02,3243.98 4500.09,3243.98 4992.8,2751.27 v1(4992.8,2670) ; QS2.4@3407.01,4034.86 ccw(c3459.8,4034.86) 3422.47,3997.53 ; QS2.4@3417.01,4034.86 ccw(c3493.95,4034.86) 3439.54,3980.46 ; v1@4987.85,2674.95 ccw(c4975.9,2686.9) 4992.8,2686.9 ccw(c5009.69,2686.9) v1@4997.75,2674.95
QS3-0: QS3.3 U4.80 | length 3540.4
  Top Layer w10: U4.80@4872.49,2703.66 cw(c4869.22,2708.69) 4864.97,2704.45 ; U4.80@4905.2,2698.78 4899.53,2704.45 4864.97,2704.45 ; QS3.3@4985.94,3924.17 4999.65,3924.17 5106.85,4031.37 5106.85,4321.34 4873.43,4554.76 4532.08,4554.76 4298.66,4321.34 4298.66,3966.34 4430,3835 4430,3139.42 4864.97,2704.45 ; QS3.3@5008.03,3954.43 ccw(c5008.03,4007.25) 5045.38,3969.9 ; QS3.3@5008.03,3964.43 ccw(c5008.03,4041.39) 5062.45,3986.97 ; QS3.3@5008.03,3974.43 ccw(c5008.03,4075.53) 5079.52,4004.04
QS3-1: QS3.13 U4.79 | length 1423.5
  Top Layer w10: QS3.13@4419.57,3924.17 4450,3893.74 4450,3150.92 4864.97,2735.95 ; U4.79@4872.49,2735.16 cw(c4869.22,2740.19) 4864.97,2735.94 ; U4.79@4905.2,2730.28 4899.53,2735.95 4864.97,2735.95
QS3-2: QS3.12 U4.78 | length 2127.4
  Top Layer w10: QS3.12@4357.52,4012.3 cw(c4357.52,3842.86) 4477.33,3962.67 ; QS3.12@4357.52,4022.3 cw(c4357.52,3877) 4460.26,3979.74 ; QS3.12@4357.52,4032.3 cw(c4357.52,3911.14) 4443.19,3996.81 ; QS3.12@4357.52,4042.3 cw(c4357.52,3945.28) 4426.12,4013.88 ; QS3.12@4357.52,4052.3 cw(c4357.52,3979.43) 4409.05,4030.95 ; QS3.12@4357.52,4062.3 cw(c4357.52,4013.57) 4391.97,4048.03 ; QS3.12@4357.52,4072.3 cw(c4357.52,4047.71) QS3.12@4374.9,4065.1 ; QS3.12@4370.6,4069.4 4488.81,3951.19 4488.81,3878.51 4470,3859.71 4470,3162.41 4864.97,2767.44 ; U4.78@4872.49,2766.65 cw(c4869.22,2771.68) 4864.97,2767.44 ; U4.78@4905.2,2761.77 4899.53,2767.44 4864.97,2767.44
  Top Layer w15: QS3.12@4349.63,4069.4 QS3.12@4370.6,4069.4
QS3-3: QS3.11 U4.77 | length 2015.1
  Top Layer w10: QS3.11@4341.75,4173.49 cw(c4341.75,4041.3) 4435.22,4134.78 ; QS3.11@4341.75,4183.49 cw(c4341.75,4075.44) 4418.15,4151.85 ; QS3.11@4341.75,4193.49 cw(c4341.75,4109.58) 4401.08,4168.92 ; QS3.11@4341.75,4203.49 cw(c4341.75,4143.73) 4384.01,4185.99 ; QS3.11@4349.63,4230.6 4349.63,4220.37 4511.31,4058.69 4511.31,3872.73 4490,3851.42 4490,3173.91 4864.97,2798.94 ; U4.77@4872.49,2798.15 cw(c4869.22,2803.18) 4864.97,2798.94 ; U4.77@4905.2,2793.27 4899.53,2798.94 4864.97,2798.94
QS3-4: QS3.10 U4.76 | length 1931.5
  Top Layer w10: QS3.10@4419.57,4353.27 cw(c4419.57,4298.81) 4458.08,4337.32 cw(c4496.59,4375.83) QS3.10@4442.13,4375.83 ; QS3.10@4419.57,4363.27 cw(c4419.57,4332.95) 4441.01,4354.39 cw(c4462.45,4375.83) QS3.10@4432.13,4375.83 ; QS3.10@4419.57,4375.83 4531.31,4264.1 4531.31,3864.44 4510,3843.14 4510,3185.4 4864.97,2830.43 ; U4.76@4872.49,2829.65 cw(c4869.22,2834.68) 4864.97,2830.43 ; U4.76@4905.2,2824.76 4899.53,2830.43 4864.97,2830.43